# EAGLE board InkTime (EAGLE 9.7.0)
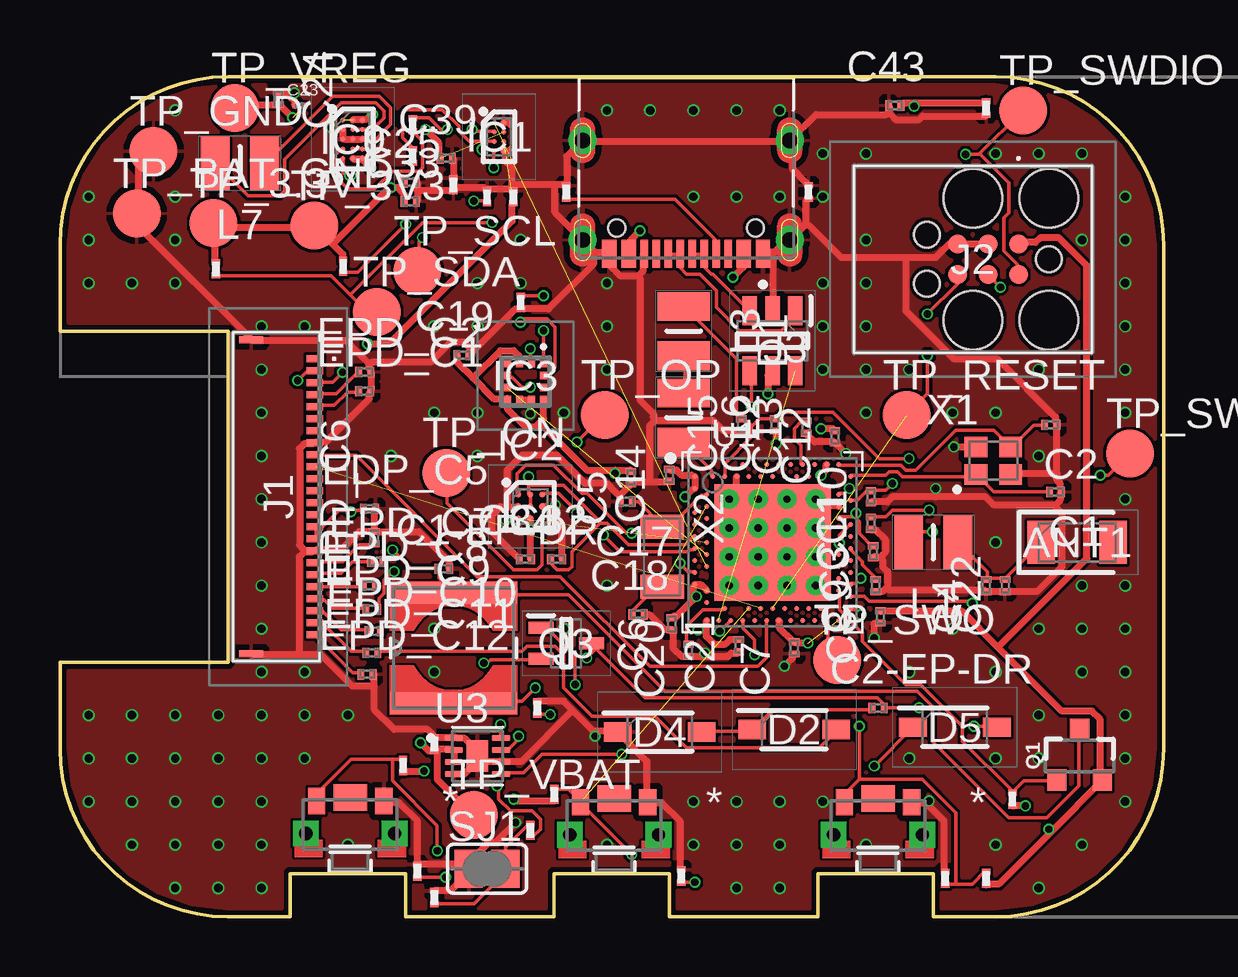
[diagram p0: board, top side]
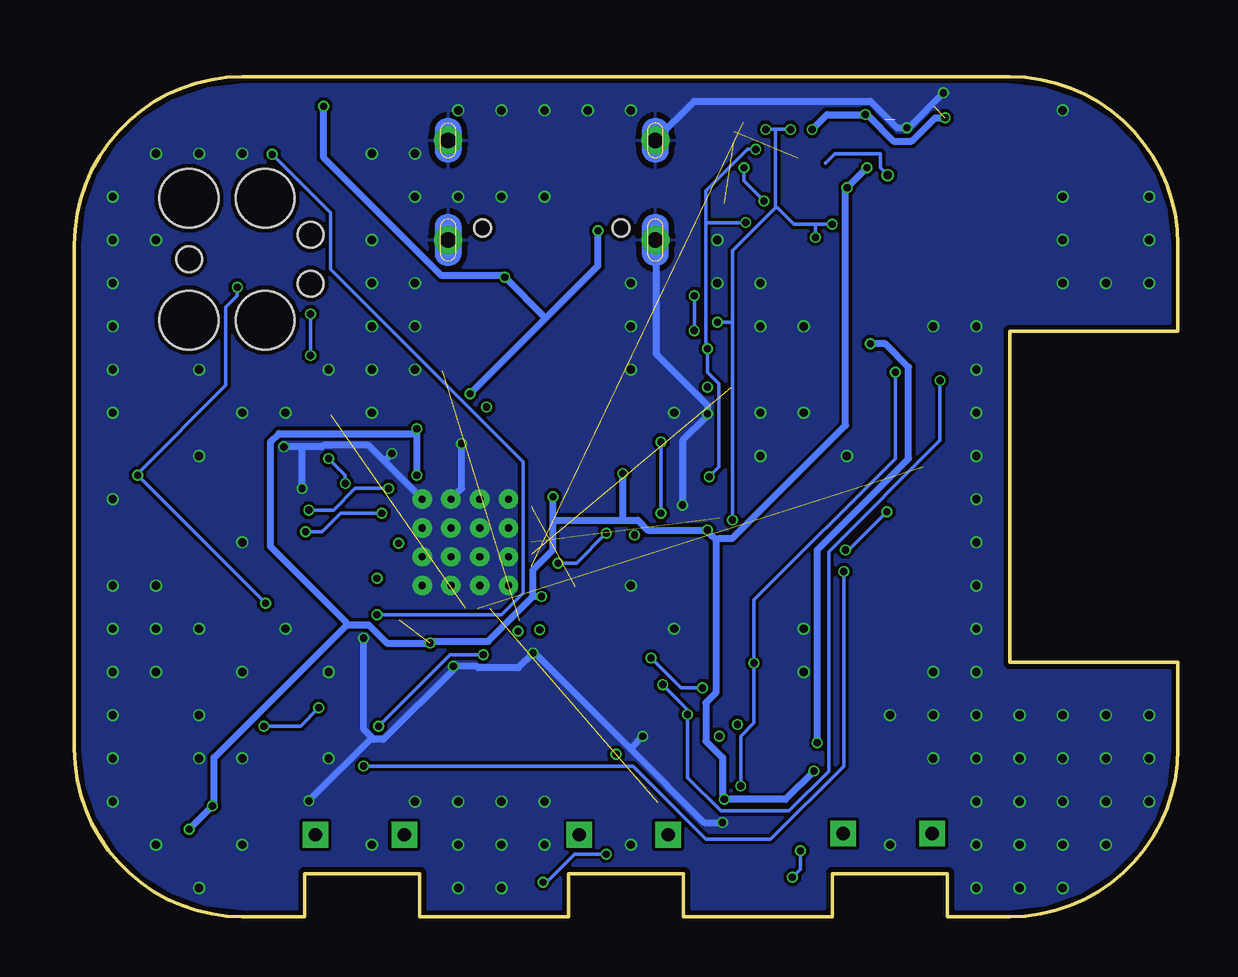
[diagram p1: board, bottom side, seen from below]

Size 46 x 35 mm. Coordinates in mm from the lower left corner, seen from the top.
Outline: 39,0 36.4,0 36.4,1.8 31.6,1.8 31.6,0 25.4,0 25.4,1.8 20.6,1.8 20.6,0 14.4,0 14.4,1.8 9.6,1.8 9.6,0 7,0 arc-90 0,7 0,10.6 7,10.6 7,24.4 0,24.4 0,28 arc-90 7,35 39,35 arc-90 46,28 46,7 arc-90 39,0
Copper layers (1+2*63+16): Top / GND / Bottom / layer 63
Stack-up 4 Layer Stack: Top SilkScreen Epoxy Ink / Top SolderMask User Defined 0.02mm Dk 4.3 / Top Surface Finish Lead-Free 0.02mm / Top User Defined 0.03mm / Dielectric-1 User Defined 0.034mm / Dielectric-2 User Defined 0.034mm / GND User Defined 0.03mm / Dielectric-3 User Defined 0.664mm / Power User Defined 0.03mm / Dielectric-4 User Defined 0.034mm / Dielectric-5 User Defined 0.034mm / Bottom User Defined 0.03mm / Bottom Surface Finish Lead-Free 0.02mm / Bottom SolderMask User Defined 0.02mm Dk 4.3 / Bottom SilkScreen Epoxy Ink
Design rules: minimum copper width all 0.15mm, minimum copper width classes=1 0.3mm, minimum copper width 0.15mm, minimum drill size 0.2mm, copper clearance wire_polygon to wire_polygon 5mil, copper clearance wire_polygon to pad_smd 5mil, copper clearance wire_polygon to via 5mil, copper clearance pad_smd to pad_smd 5mil, copper clearance pad_smd to via 5mil, copper clearance via to via 5mil, copper clearance smd to pad (same net) 5mil, copper clearance smd to via (same net) 5mil, copper clearance smd to smd (same net) 5mil, dimension clearance 0.2mm, via restrict clearance 0mil, restrict clearance 0mil, drill distance 6mil, keepout clearance 0mil
Net classes: 1 POWER: width 0.3 mm

## Footprints (pad centres in the part's own frame; a part is rotated, then mirrored left to right if it is on the bottom)
2450AT18B100E_ANTC3216X140N = smd 1.15 x 1.8: 1 -1.5,0; 2 1.5,0
NORDIC_NRF_3_RESC0201_L = smd 0.28 x 0.43: 1 -0.255,0; 2 0.255,0
GRM011R60J152KE01L_2_CAPC0201X13N = smd 0.22 x 0.23: 1 -0.185,0; 2 0.185,0
GRM011R60J152KE01L_1_0201 = smd 0.35 x 0.25: 1 0,0.275; 2 0,-0.275
ESP32_C6_LIBRARY_3_SOT95P280X145-6N = smd 1.2 x 0.6: 1 -1.25,0.95; 2 -1.25,0; 3 -1.25,-0.95; 4 1.25,-0.95; 5 1.25,0; 6 1.25,0.95
ESP32_C6_LIBRARY_5_SOD3716X135N = smd 1.15 x 0.8: 1 -1.75,0; 2 1.75,0
BQ25180YBGR_BGA8C40P2X4_100X155X50 = smd 0.2 x 0.2: A1 -0.2,0.6; A2 0.2,0.6; B1 -0.2,0.2; B2 0.2,0.2; C1 -0.2,-0.2; C2 0.2,-0.2; D1 -0.2,-0.6; D2 0.2,-0.6
DRV2605YZFR_BGA9C50P3X3_144X144X62 = smd 0.25 x 0.25: A1 -0.5,0.5; A2 0,0.5; A3 0.5,0.5; B1 -0.5,0; B2 0,0; B3 0.5,0; C1 -0.5,-0.5; C2 0,-0.5; C3 0.5,-0.5
BMA423_BMA423 = smd 0.3 x 0.35: 1 -0.75,-0.775; 2 -0.25,-0.775; 3 0.25,-0.775; 4 0.75,-0.775; 7 0.75,0.775; 8 0.25,0.775; 9 -0.25,0.775; 10 -0.75,0.775 | smd 0.35 x 0.3: 5 0.775,-0.25; 6 0.775,0.25; 11 -0.775,0.25; 12 -0.775,-0.25
RT6160AWSC_BGA15C40P3X5_140X230X60 = smd 0.216 x 0.216: A1 -0.4,0.8; A2 0,0.8; A3 0.4,0.8; B1 -0.4,0.4; B2 0,0.4; B3 0.4,0.4; C1 -0.4,0; C2 0,0; C3 0.4,0; D1 -0.4,-0.4; D2 0,-0.4; D3 0.4,-0.4; E1 -0.4,-0.8; E2 0,-0.8; E3 0.4,-0.8
503480-2400_5034802400 = smd 0.3 x 0.7: 1 -5.75,1.525; 2 -5.25,1.525; 3 -4.75,1.525; 4 -4.25,1.525; 5 -3.75,1.525; 6 -3.25,1.525; 7 -2.75,1.525; 8 -2.25,1.525; 9 -1.75,1.525; 10 -1.25,1.525; 11 -0.75,1.525; 12 -0.25,1.525; 13 0.25,1.525; 14 0.75,1.525; 15 1.25,1.525; 16 1.75,1.525; 17 2.25,1.525; 18 2.75,1.525; 19 3.25,1.525; 20 3.75,1.525; 21 4.25,1.525; 22 4.75,1.525; 23 5.25,1.525; 24 5.75,1.525 | smd 0.3 x 1: MP1 -6.54,-1.125; MP2 6.54,-1.125
TC2030-IDC_TC2030IDC = smd 0.783 x 0.783: 1 -0.953,-0.635; 2 -0.953,0.635; 3 0.317,-0.635; 4 0.317,0.635; 5 1.588,-0.635; 6 1.588,0.635 | hole 2.451: -2.223,-2.54; -2.223,2.54; 0.952,-2.54; 0.952,2.54 | hole 1.067: -2.223,0; 2.857,-1.016; 2.857,1.016
KH-TYPE-C-16P_KINGHELM_KH-TYPE-C-16P = smd 0.6 x 1.15: A1_B12 -3.2,4.725; A4_B9 -2.4,4.725; A9_B4 2.4,4.725; A12_B1 3.2,4.725 | smd 0.3 x 1.15: A5 -1.25,4.725; A6 -0.25,4.725; A7 0.25,4.725; A8 1.25,4.725; B5 1.75,4.725; B6 0.75,4.725; B7 -0.75,4.725; B8 -1.75,4.725 | drill 0.65 pad 1.05: SH1 -4.32,0; SH2 4.32,0; SH3 -4.32,4.15; SH4 4.32,4.15 | hole 0.7: -2.89,3.65; 2.89,3.65
MLP2016SR47MT0S1_INDC2016X100N = smd 1.2 x 2.2: 1 -1.028,0; 2 1.028,0
ESP32_C6_LIBRARY_2_IND_4828-WE-TPC_WRE = smd 0.9 x 5.3: 1 -2.286,0; 2 2.286,0
ESP32_C6_LIBRARY_4_ESP32_C6_LIBRARY_4_ESP32_C6_LIBRARY_4_ESP32_C6_LIBRARY_4_ESP32_WROVER_SPARKFUN-DISCRETESEMI_SOT23-3 = smd 0.8 x 0.9: 1 -0.95,-1; 2 0.95,-1; 3 0,1.1
ESP32_C6_LIBRARY_6_SOT65P210X110-3N = smd 1.05 x 0.5: 1 -1.05,0.65; 2 -1.05,-0.65; 3 1.05,0
CPF0201D7K68C1_0201 = smd 0.35 x 0.25: 1 0,0.275; 2 0,-0.275
ERA-1AEB3401C_0201 = smd 0.35 x 0.25: 1 0,0.275; 2 0,-0.275
ESP32_C6_LIBRARY_7_JUMPER_SJ = smd 1.168 x 1.6: 1 -0.762,0; 2 0.762,0
2025-10-22_07-23-44_LIBRARY_SW_EVP-AKE31A_PAN = smd 0.711 x 1.092: 1 -1.4,-0.972; 2 1.4,-0.972 | drill 0.559 pad 0.914 square: 3 -1.848,0.381; 4 1.848,0.381 | smd 1.397 x 1.092: 5 0,-1.124
HECTOR_WATCH_1_TP20R = smd 2 x 2: TP 0,0
NORDIC_NRF_4_AQFN50P700X700X85_HS-74N = smd 4.85 x 4.85: P$74 0,0 | drill 0.3 pad 0.6: P$75 -1.8,1.8; P$76 -0.6,1.8; P$77 0.6,1.8; P$78 1.8,1.8; P$79 -1.8,0.6; P$80 -0.6,0.6; P$81 0.6,0.6; P$82 1.8,0.6; P$83 -1.8,-0.6; P$84 -0.6,-0.6; P$85 0.6,-0.6; P$86 1.8,-0.6; P$87 -1.8,-1.8; P$88 -0.6,-1.8; P$89 0.6,-1.8; P$90 1.8,-1.8 | smd 0.2 x 0.2: P$A8 -1.25,3.25; P$A10 -0.75,3.25; P$A12 -0.25,3.25; P$A14 0.25,3.25; P$A16 0.75,3.25; P$A18 1.25,3.25; P$A20 1.75,3.25; P$A22 2.25,3.25; P$A23 2.75,3.25; P$AA24 3.25,-2.25; P$AB2 -2.75,-2.5; P$AC5 -2,-2.75; P$AC9 -1,-2.75; P$AC11 -0.5,-2.75; P$AC13 0,-2.75; P$AC15 0.5,-2.75; P$AC17 1,-2.75; P$AC19 1.5,-2.75; P$AC21 2,-2.75; P$AC24 3.25,-2.75; P$AD2 -2.75,-3.25; P$AD4 -2.25,-3.25; P$AD6 -1.75,-3.25; P$AD8 -1.25,-3.25; P$AD10 -0.75,-3.25; P$AD12 -0.25,-3.25; P$AD14 0.25,-3.25; P$AD16 0.75,-3.25; P$AD18 1.25,-3.25; P$AD20 1.75,-3.25; P$AD22 2.25,-3.25; P$AD23 2.75,-3.25; P$B1 -3.25,2.75; P$B3 -2.5,2.75; P$B5 -2,2.75; P$B7 -1.5,2.75; P$B9 -1,2.75; P$B11 -0.5,2.75; P$B13 0,2.75; P$B15 0.5,2.75; P$B17 1,2.75; P$B19 1.5,2.75; P$B24 3.25,2.75; P$C1 -3.25,2.25; P$D2 -2.75,2; P$D23 2.75,2; P$E24 3.25,1.75; P$F2 -2.75,1.5; P$F23 2.75,1.5; P$G1 -3.25,1.25; P$H2 -2.75,1; P$H23 2.75,1; P$J1 -3.25,0.75; P$J24 3.25,0.75; P$K2 -2.75,0.5; P$L1 -3.25,0.25; P$L24 3.25,0.25; P$M2 -2.75,0; P$N1 -3.25,-0.25; P$N24 3.25,-0.25; P$P2 -2.75,-0.5; P$P23 2.75,-0.5; P$R1 -3.25,-0.75; P$R24 3.25,-0.75; P$T2 -2.75,-1; P$T23 2.75,-1; P$U1 -3.25,-1.25; P$U24 3.25,-1.25; P$V23 2.75,-1.5; P$W1 -3.25,-1.75; P$W24 3.25,-1.75; P$Y2 -2.75,-2; P$Y23 2.75,-2
ESP32_C6_LIBRARY_SON50P200X200X80-9N = smd 0.76 x 0.27: 1 -0.985,0.75; 2 -0.985,0.25; 3 -0.985,-0.25; 4 -0.985,-0.75; 5 0.985,-0.75; 6 0.985,-0.25; 7 0.985,0.25; 8 0.985,0.75 | smd 0.9 x 1.3: 9 0,0
NORDIC_NRF_BT-XTAL_2016_N = smd 0.95 x 0.85: 1 -0.725,-0.575; 2 0.725,-0.575; 3 0.725,0.575; 4 -0.725,0.575
NORDIC_NRF_1_XTAL_3215_N = smd 1 x 1.8: 1 -1.25,0; 2 1.25,0

## Placement (x,y rotation side)
ANT1  2450AT18B100E_2450AT18B100E  [2450AT18B100E_ANTC3216X140N]  42.4,15.6 0 top
C1  12pF  [NORDIC_NRF_3_RESC0201_L]  41.5,17.7 180 top
C1-EP-DR  10uF  [NORDIC_NRF_3_RESC0201_L]  16,14.5 0 top
C2  12pF  [NORDIC_NRF_3_RESC0201_L]  41.3,20.5 180 top
C2-EP-DR  4.7uF/25V  [NORDIC_NRF_3_RESC0201_L]  34.1,8.7 0 top
C3  1pF  [NORDIC_NRF_3_RESC0201_L]  33.9,15.2 90 top
C4  1pF  [NORDIC_NRF_3_RESC0201_L]  38.6,13.8 90 top
C5  100nF  [NORDIC_NRF_3_RESC0201_L]  23.8,18.3 90 top
C6  4.7uF  [NORDIC_NRF_3_RESC0201_L]  25.5,12.2 90 top
C7  100nF  [NORDIC_NRF_3_RESC0201_L]  30.6,11.2 90 top
C8  100nF  [NORDIC_NRF_3_RESC0201_L]  34.2,12.5 90 top
C9  820pF  [NORDIC_NRF_3_RESC0201_L]  34,13.8 90 top
C10  100pF  [NORDIC_NRF_3_RESC0201_L]  33.8,17.5 90 top
C11  100pF  [NORDIC_NRF_3_RESC0201_L]  33.8,16.4 90 top
C12  100nF  [NORDIC_NRF_3_RESC0201_L]  32.3,20 90 top
C13  100nF  [NORDIC_NRF_3_RESC0201_L]  31.1,20.4 90 top
C14  4.7uF  [NORDIC_NRF_3_RESC0201_L]  25.4,18.4 90 top
C15  1.0uF  [NORDIC_NRF_3_RESC0201_L]  28.4,20.5 90 top
C16  47nF  [NORDIC_NRF_3_RESC0201_L]  29.8,20.5 90 top
C17  12pF  [NORDIC_NRF_3_RESC0201_L]  23.6,17.3 180 top
C18  12pF  [NORDIC_NRF_3_RESC0201_L]  24.1,12.6 0 top
C19  100nF  [NORDIC_NRF_3_RESC0201_L]  16.8,23.4 0 top
C20  4.7uF  [NORDIC_NRF_3_RESC0201_L]  26.2,11.1 90 top
C21  4.7uF  [NORDIC_NRF_3_RESC0201_L]  28.3,11.3 90 top
C22  1pF  [NORDIC_NRF_3_RESC0201_L]  39.4,13.8 90 top
C23  0.1uF  [GRM011R60J152KE01L_2_CAPC0201X13N]  10,33.8 0 top
C24  10uF  [NORDIC_NRF_3_RESC0201_L]  9.1,34.1 270 top
C25  22uF  [NORDIC_NRF_3_RESC0201_L]  14.6,30.6 0 top
C27  0.1uF  [GRM011R60J152KE01L_1_0201]  15.6,7.2 0 top
C29  1uF  [GRM011R60J152KE01L_1_0201]  14.9,1.9 0 top
C30  1uF  [GRM011R60J152KE01L_1_0201]  36.9,1.6 0 top
C31  1uF  [GRM011R60J152KE01L_1_0201]  25.9,1.7 0 top
C32  1uF  [NORDIC_NRF_3_RESC0201_L]  20.7,14.9 0 top
C33  22uF  [NORDIC_NRF_3_RESC0201_L]  14.6,29.8 0 top
C34  0.1uF  [NORDIC_NRF_3_RESC0201_L]  19.4,14.9 0 top
C37  1uF  [GRM011R60J152KE01L_1_0201]  18.9,30 0 top
C38  1uF  [GRM011R60J152KE01L_1_0201]  16.4,30.5 0 top
C39  10uF  [NORDIC_NRF_3_RESC0201_L]  16.1,31.6 0 top
C42  0.1uF  [GRM011R60J152KE01L_1_0201]  38.6,33.7 0 top
C43  4.7uF  [NORDIC_NRF_3_RESC0201_L]  34.8,33.8 0 top
D1  ESP32_C6_LIBRARY_3_USBLC6-2SC6Y  [ESP32_C6_LIBRARY_3_SOT95P280X145-6N]  29.7,24 270 top
D2  ESP32_C6_LIBRARY_5_MBR0530  [ESP32_C6_LIBRARY_5_SOD3716X135N]  30.6,7.8 0 top
D4  ESP32_C6_LIBRARY_5_MBR0530  [ESP32_C6_LIBRARY_5_SOD3716X135N]  25,7.7 0 top
D5  ESP32_C6_LIBRARY_5_MBR0530  [ESP32_C6_LIBRARY_5_SOD3716X135N]  37.3,7.9 0 top
EDP_C5  1uF/50V  [NORDIC_NRF_3_RESC0201_L]  12.9,17 0 top
EPD_C1  1uF/50V  [NORDIC_NRF_3_RESC0201_L]  12.7,21.9 0 top
EPD_C2  1uF/50V  [NORDIC_NRF_3_RESC0201_L]  12.7,22.7 0 top
EPD_C6  1uF/50V  [NORDIC_NRF_3_RESC0201_L]  13.1,15.8 90 top
EPD_C7  1uF/50V  [NORDIC_NRF_3_RESC0201_L]  13.2,14.8 0 top
EPD_C8  1uF/50V  [NORDIC_NRF_3_RESC0201_L]  12.9,13.8 0 top
EPD_C9  1uF/50V  [NORDIC_NRF_3_RESC0201_L]  13,12.8 0 top
EPD_C10  1uF/50V  [NORDIC_NRF_3_RESC0201_L]  13.1,11.9 0 top
EPD_C11  1uF/50V  [NORDIC_NRF_3_RESC0201_L]  13,11 0 top
EPD_C12  1uF/50V  [NORDIC_NRF_3_RESC0201_L]  12.8,10.1 0 top
IC1  BQ25180YBGR_BQ25180YBGR  [BQ25180YBGR_BGA8C40P2X4_100X155X50]  18.3,32.5 0 top
IC2  DRV2605YZFR_DRV2605YZFR  [DRV2605YZFR_BGA9C50P3X3_144X144X62]  19.6,17.1 0 top
IC3  BMA423_BMA423  [BMA423_BMA423]  19.4,22.3 180 top
IC9  RT6160AWSC_RT6160AWSC  [RT6160AWSC_BGA15C40P3X5_140X230X60]  12.2,32.4 0 top
J1  503480-2400_503480-2400  [503480-2400_5034802400]  9.1,17.5 270 top
J2  TC2030-IDC_TC2030-IDC  [TC2030-IDC_TC2030IDC]  39,27.4 180 top
J3  KH-TYPE-C-16P_KH-TYPE-C-16P  [KH-TYPE-C-16P_KINGHELM_KH-TYPE-C-16P]  26.1,32.35 180 top
L1  3.9nH  [MLP2016SR47MT0S1_INDC2016X100N]  36.4,15.6 0 top
L2  10uH  [MLP2016SR47MT0S1_INDC2016X100N]  26,20.8 90 top
L3  15nH  [MLP2016SR47MT0S1_INDC2016X100N]  26,24.4 90 top
L5  68uH  [ESP32_C6_LIBRARY_2_IND_4828-WE-TPC_WRE]  16.4,11.2 90 top
L7  MLP2016SR47MT0S1_FTC252012SR47MBCA  [MLP2016SR47MT0S1_INDC2016X100N]  7.5,31.4 0 top
Q1  20V/4.2A/52mΩ/1.4W  [ESP32_C6_LIBRARY_4_ESP32_C6_LIBRARY_4_ESP32_C6_LIBRARY_4_ESP32_C6_LIBRARY_4_ESP32_WROVER_SPARKFUN-DISCRETESEMI_SOT23-3]  42.5,6.7 0 top
Q3  ESP32_C6_LIBRARY_6_SI1308EDL-T1-GE3  [ESP32_C6_LIBRARY_6_SOT65P210X110-3N]  21.1,11.4 0 top
R1  0  [CPF0201D7K68C1_0201]  14.7,33 0 top
R1_EP_DR  0.47  [CPF0201D7K68C1_0201]  19.6,3.6 0 top
R1_USB  5K1  [ERA-1AEB3401C_0201]  21.1,30.2 0 top
R2  0  [CPF0201D7K68C1_0201]  14.7,31.7 0 top
R2_EP_DR  10K  [CPF0201D7K68C1_0201]  19.9,8.7 0 top
R2_USB  5K1  [ERA-1AEB3401C_0201]  31.2,30.2 0 top
R3  0  [ERA-1AEB3401C_0201]  19.2,25.6 180 top
R5  10K  [ERA-1AEB3401C_0201]  38.6,1.6 0 top
R7  10K  [ERA-1AEB3401C_0201]  14.3,6.3 0 top
R8  10K  [ERA-1AEB3401C_0201]  20.6,5.1 0 top
R9  10K  [ERA-1AEB3401C_0201]  17.8,30 0 top
R17  3K3  [ERA-1AEB3401C_0201]  11.8,27.1 0 top
R18  3K3  [ERA-1AEB3401C_0201]  6.5,27 0 top
R_PWR_EPD  10K  [CPF0201D7K68C1_0201]  39.7,4.9 0 top
R_TYPE_SEL  2.2  [CPF0201D7K68C1_0201]  15.6,0.8 0 top
SJ1  Open  [ESP32_C6_LIBRARY_7_JUMPER_SJ]  17.8,2 0 top
SW_DN  2025-10-22_07-23-44_LIBRARY_EVP-AKE31ASW_EVP-AKE31A_PAN  [2025-10-22_07-23-44_LIBRARY_SW_EVP-AKE31A_PAN]  12.1,3.85 180 top
SW_ENT  2025-10-22_07-23-44_LIBRARY_EVP-AKE31ASW_EVP-AKE31A_PAN  [2025-10-22_07-23-44_LIBRARY_SW_EVP-AKE31A_PAN]  23.1,3.8 180 top
SW_UP  2025-10-22_07-23-44_LIBRARY_EVP-AKE31ASW_EVP-AKE31A_PAN  [2025-10-22_07-23-44_LIBRARY_SW_EVP-AKE31A_PAN]  34.1,3.8 180 top
TP_3.3V  HECTOR_WATCH_1_TPTP20R  [HECTOR_WATCH_1_TP20R]  6.4,28.9 0 top
TP_3V3  HECTOR_WATCH_1_TPTP20R  [HECTOR_WATCH_1_TP20R]  10.6,28.8 0 top
TP_BAT_GND  HECTOR_WATCH_1_TPTP20R  [HECTOR_WATCH_1_TP20R]  3.2,29.3 0 top
TP_GND  HECTOR_WATCH_1_TPTP20R  [HECTOR_WATCH_1_TP20R]  3.9,31.9 0 top
TP_ON  HECTOR_WATCH_1_TPTP20R  [HECTOR_WATCH_1_TP20R]  16.1,18.5 0 top
TP_OP  HECTOR_WATCH_1_TPTP20R  [HECTOR_WATCH_1_TP20R]  22.7,20.9 0 top
TP_RESET  HECTOR_WATCH_1_TPTP20R  [HECTOR_WATCH_1_TP20R]  35.3,20.9 0 top
TP_SCL  HECTOR_WATCH_1_TPTP20R  [HECTOR_WATCH_1_TP20R]  14.9,26.9 0 top
TP_SDA  HECTOR_WATCH_1_TPTP20R  [HECTOR_WATCH_1_TP20R]  13.2,25.2 0 top
TP_SWDCLK  HECTOR_WATCH_1_TPTP20R  [HECTOR_WATCH_1_TP20R]  44.6,19.3 0 top
TP_SWDIO  HECTOR_WATCH_1_TPTP20R  [HECTOR_WATCH_1_TP20R]  40.15,33.6 0 top
TP_SWO  HECTOR_WATCH_1_TPTP20R  [HECTOR_WATCH_1_TP20R]  32.4,10.7 0 top
TP_VBAT  HECTOR_WATCH_1_TPTP20R  [HECTOR_WATCH_1_TP20R]  17.25,4.25 0 top
TP_VREG  HECTOR_WATCH_1_TPTP20R  [HECTOR_WATCH_1_TP20R]  7.3,33.7 0 top
U1  NORDIC_NRF_4_NRF52840_QF  [NORDIC_NRF_4_AQFN50P700X700X85_HS-74N]  29.7,15.6 0 top
U3  ESP32_C6_LIBRARY_MAX17048G+T10  [ESP32_C6_LIBRARY_SON50P200X200X80-9N]  17.4,6.7 0 top
X1  32MHz  [NORDIC_NRF_BT-XTAL_2016_N]  38.9,19 0 top
X2  32.768kHz  [NORDIC_NRF_1_XTAL_3215_N]  25.1,15 270 top

## Library data of the parts
ANT1 = InkTime_v5; ARROW_PART_NUMBER: 2450AT18B100E; ARROW_PRICE-STOCK: https://www.arrow.com/en/products/2450at18b100e/johanson-dielectrics?utm_currency=USD&region=nac; DESCRIPTION: Antennas 2.45GHz ANTENNA; HEIGHT: 1.4mm; MANUFACTURER_NAME: JOHANSON TECHNOLOGY; MANUFACTURER_PART_NUMBER: 2450AT18B100E; MOUSER_PART_NUMBER: 609-2450AT18B100E; MOUSER_PRICE-STOCK: https://www.mouser.co.uk/ProductDetail/Johanson-Technology/2450AT18B100E?qs=yCnrNFeXz%252Bh5MFsFIXGZGA%3D%3D
C1 C1-EP-DR C2 C2-EP-DR C3-C22 C24 C25 C27 C29-C34 C37-C39 C42 C43 EDP_C5 EPD_C1 EPD_C2 EPD_C6-EPD_C12 R1 R1_EP_DR R1_USB R2 R2_EP_DR R2_USB R3 R5 R7-R9 R17 R18 R_PWR_EPD R_TYPE_SEL SJ1 TP_3.3V TP_3V3 TP_BAT_GND TP_GND TP_ON TP_OP TP_RESET TP_SCL TP_SDA TP_SWDCLK TP_SWDIO TP_SWO TP_VBAT TP_VREG U1 X1 X2 = InkTime_v5
C23 = InkTime_v5; AVAILABILITY: In Stock; CHECK_PRICES: https://www.snapeda.com/parts/GRM011R60J152KE01L/Murata/view-part/?ref=eda; DESCRIPTION: SMD Capacitor X5R(EIA) with Capacitance: 1500pF Tol. 10%. Rated Voltage: 6.3Vdc; MF: Murata; MP: GRM011R60J152KE01L; PACKAGE: 0201 Murata; PRICE: None; SNAPEDA_LINK: https://www.snapeda.com/parts/GRM011R60J152KE01L/Murata/view-part/?ref=snap
D1 = InkTime_v5; AVAILABILITY: In Stock; CHECK_PRICES: https://www.snapeda.com/parts/USBLC6-2SC6Y/STMicroelectronics/view-part/?ref=eda; DESCRIPTION: 17V Clamp 5A (8/20µs) Ipp Tvs Diode Surface Mount SOT-23-6; MF: STMicroelectronics; MP: USBLC6-2SC6Y; PACKAGE: SOT-23-6 STMicroelectronics; PRICE: None; SNAPEDA_LINK: https://www.snapeda.com/parts/USBLC6-2SC6Y/STMicroelectronics/view-part/?ref=snap
D2 D4 D5 = InkTime_v5; AVAILABILITY: In Stock; CHECK_PRICES: https://www.snapeda.com/parts/MBR0530/Onsemi/view-part/?ref=eda; DESCRIPTION: Diode Schottky 30 V 500mA Surface Mount SOD-123; MF: ON Semiconductor; MP: MBR0530; PACKAGE: SOD-123-2 ON Semiconductor; PRICE: None; PURCHASE-URL: https://www.snapeda.com/api/url_track_click_mouser/?unipart_id=179458&manufacturer=ON Semiconductor&part_name=MBR0530&search_term=None; SNAPEDA_LINK: https://www.snapeda.com/parts/MBR0530/Onsemi/view-part/?ref=snap
IC1 = InkTime_v5; ARROW_PART_NUMBER: BQ25180YBGR; ARROW_PRICE-STOCK: https://www.arrow.com/en/products/bq25180ybgr/texas-instruments?utm_currency=USD&region=nac; DESCRIPTION: Charger IC Lithium Ion/Polymer, Lithium Iron Phosphate 8-DSBGA (1.6x1.1); HEIGHT: 0.5mm; MANUFACTURER_NAME: Texas Instruments; MANUFACTURER_PART_NUMBER: BQ25180YBGR; MOUSER_PART_NUMBER: 595-BQ25180YBGR; MOUSER_PRICE-STOCK: https://www.mouser.co.uk/ProductDetail/Texas-Instruments/BQ25180YBGR?qs=doiCPypUmgEWjAK%252BJAX6Tw%3D%3D
IC2 = InkTime_v5; ARROW_PART_NUMBER: DRV2605YZFR; ARROW_PRICE-STOCK: https://www.arrow.com/en/products/drv2605yzfr/texas-instruments?region=nac; DESCRIPTION: Haptic Driver for ERM/LRA with Built-In Library and Smart Loop Architecture; HEIGHT: 0.625mm; MANUFACTURER_NAME: Texas Instruments; MANUFACTURER_PART_NUMBER: DRV2605YZFR
IC3 = InkTime_v5; ARROW_PART_NUMBER: BMA423; ARROW_PRICE-STOCK: https://www.arrow.com/en/products/bma423/bosch; DESCRIPTION: Accelerometers Triaxial low-g 12bit Acceleration Sensor; HEIGHT: 1mm; MANUFACTURER_NAME: BOSCH; MANUFACTURER_PART_NUMBER: BMA423; MOUSER_PART_NUMBER: 262-BMA423; MOUSER_PRICE-STOCK: https://www.mouser.co.uk/ProductDetail/Bosch-Sensortec/BMA423?qs=HXFqYaX1Q2xC%252BSgeGoX3mg%3D%3D
IC9 = InkTime_v5; DESCRIPTION: Buck-Boost Regulator Positive Output Step-Up/Step-Down I2C DC-DC Controller IC 15-WL-CSP (BSC) (1.4x2.3); HEIGHT: 0.6mm; MANUFACTURER_NAME: RICHTEK; MANUFACTURER_PART_NUMBER: RT6160AWSC; MOUSER_PART_NUMBER: 835-RT6160AWSC; MOUSER_PRICE-STOCK: https://www.mouser.co.uk/ProductDetail/Richtek/RT6160AWSC?qs=amGC7iS6iy%2FLd9PSoixZXQ%3D%3D
J1 = InkTime_v5; DESCRIPTION: FFC & FPC Connectors 0.5mm FPC RA SMT Dual Contact 24Ckt; HEIGHT: 1.87mm; MANUFACTURER_NAME: Molex; MANUFACTURER_PART_NUMBER: 503480-2400; MOUSER_PART_NUMBER: 538-503480-2400; MOUSER_PRICE-STOCK: https://www.mouser.co.uk/ProductDetail/Molex/503480-2400?qs=OAhjpuo3Vu7efIoxFh9AOw%3D%3D
J2 = InkTime_v5; DESCRIPTION: CABLE ADAPTER 6 POS; HEIGHT: 19mm; MANUFACTURER_NAME: Tag Connect; MANUFACTURER_PART_NUMBER: TC2030-IDC
J3 = InkTime_v5; AVAILABILITY: Not in stock; CHECK_PRICES: https://www.snapeda.com/parts/KH-TYPE-C-16P/Kinghelm/view-part/?ref=eda; MF: kinghelm; MP: KH-TYPE-C-16P; PACKAGE: None; PRICE: None; SNAPEDA_LINK: https://www.snapeda.com/parts/KH-TYPE-C-16P/Kinghelm/view-part/?ref=snap
L1-L3 L7 = InkTime_v5; DESCRIPTION: SMD / SMT Inductors (Coils), L=0.47?H, L x W x T :; HEIGHT: 1mm; JLCPCB: https://jlcpcb.com/partdetail/6763488-FTC252012SR47MBCA/C5832368; MANUFACTURER_NAME: TDK; MANUFACTURER_PART_NUMBER: FTC252012SR47MBCA
L5 = InkTime_v5; COPYRIGHT: Copyright (C) 2024 Ultra Librarian. All rights reserved.; MANUFACTURER_PART_NUMBER: 744043680; MFR_NAME: Wurth Electronics
Q1 = InkTime_v5; PROD_ID: TRAN-14388
Q3 = InkTime_v5; AVAILABILITY: In Stock; CHECK_PRICES: https://www.snapeda.com/parts/SI1308EDL-T1-GE3/Vishay+Siliconix/view-part/?ref=eda; DESCRIPTION: Si1308EDL-T1-GE3 N-channel MOSFET Transistor, 1.5 A, 30 V, 3-Pin SC-70 | Siliconix / Vishay SI1308EDL-T1-GE3; MF: Vishay Siliconix; MP: SI1308EDL-T1-GE3; PACKAGE: SOT-323 Vishay Semiconductor; PRICE: None; PURCHASE-URL: https://www.snapeda.com/api/url_track_click_mouser/?unipart_id=274603&manufacturer=Vishay Siliconix&part_name=SI1308EDL-T1-GE3&search_term=None; SNAPEDA_LINK: https://www.snapeda.com/parts/SI1308EDL-T1-GE3/Vishay+Siliconix/view-part/?ref=snap
SW_DN SW_ENT SW_UP = InkTime_v5; COPYRIGHT: Copyright (C) 2025 Ultra Librarian. All rights reserved.; DIGI-KEY_PART_NUMBER_1: P123437TR-ND; DIGI-KEY_PART_NUMBER_2: P123437CT-ND; DIGI-KEY_PART_NUMBER_3: P123437DKR-ND; MANUFACTURER_NAME: Panasonic; MANUFACTURER_PART_NUMBER: EVP-AKE31A
U3 = InkTime_v5; AVAILABILITY: In Stock; CHECK_PRICES: https://www.snapeda.com/parts/MAX17048G+T10/Analog+Devices/view-part/?ref=eda; DESCRIPTION: 3µA 1-Cell/2-Cell Fuel Gauge with ModelGauge; MF: Analog Devices; MP: MAX17048G+T10; PACKAGE: TDFN-8 Maxim; PRICE: None; PURCHASE-URL: https://www.snapeda.com/api/url_track_click_mouser/?unipart_id=329239&manufacturer=Analog Devices&part_name=MAX17048G+T10&search_term=None; SNAPEDA_LINK: https://www.snapeda.com/parts/MAX17048G+T10/Analog+Devices/view-part/?ref=snap

## Nets
3V3 [POWER]: C5.2 C6.2 C7.2 C8.2 C12.2 C14.2 C19.1 C25.1 C33.1 C34.2 IC2.C2 IC3.3 IC3.7 IC3.10 IC9.E2 IC9.E3 J2.1 Q1.2 R5.2 R7.2 R8.2 R17.1 R18.1 R_PWR_EPD.2 TP_3.3V.TP TP_3V3.TP U1.P$A22 U1.P$AD14 U1.P$AD23 U1.P$B1 U1.P$C1 U1.P$W1 U1.P$Y2
ALERT: U1.P$J24 U3.5
D+: D1.4 U1.P$AD6
D-: D1.6 U1.P$AD4
DEC3: C11.2 U1.P$D23
DEC4_6: C10.2 C15.2 C16.2 L3.2 U1.P$B5 U1.P$E24
DN: D1.1 J3.A7 J3.B6
DP: D1.3 J3.A6 J3.B7
EDP_CS: J1.12
EDP_DC: J1.11
EPD_3V3: C1-EP-DR.1 EDP_C5.1 J1.15 J1.16 L5.2 Q1.3
EPD_BUSY: J1.9 U1.P$AD12
EPD_CS: U1.P$K2
EPD_DC: U1.P$AD10
EPD_RST: J1.10 U1.P$AC11
GDR: J1.2 Q3.1 R2_EP_DR.2
GND [POWER]: C1-EP-DR.2 C1.1 C2.1 C3.1 C4.1 C5.1 C6.1 C7.1 C8.1 C9.1 C10.1 C11.1 C12.1 C13.1 C14.1 C15.1 C16.1 C17.2 C18.2 C19.2 C20.1 C21.1 C22.1 C23.1 C24.1 C25.2 C27.1 C29.1 C30.1 C31.1 C32.2 C33.2 C34.1 C37.1 C38.1 C38.2 C39.2 C42.2 C43.1 D1.2 D4.1 EDP_C5.2 EPD_C1.2 EPD_C2.2 EPD_C6.2 EPD_C12.2 IC1.A2 IC1.D2 IC2.B1 IC2.B3 IC3.8 IC3.9 IC9.B1 IC9.C1 IC9.C2 IC9.C3 J1.8 J1.17 J1.MP1 J1.MP2 J2.3 J2.5 J3.A1_B12 J3.A12_B1 J3.B5 J3.SH1 J3.SH2 J3.SH3 J3.SH4 R1_USB.1 R2_EP_DR.1 R2_USB.1 R2_USB.2 R3.1 R9.1 R_TYPE_SEL.1 SJ1.1 SW_DN.1 SW_ENT.1 SW_UP.1 TP_BAT_GND.TP TP_GND.TP U1.P$74 U1.P$75 U1.P$76 U1.P$77 U1.P$78 U1.P$79 U1.P$80 U1.P$81 U1.P$82 U1.P$83 U1.P$84 U1.P$85 U1.P$86 U1.P$87 U1.P$88 U1.P$89 U1.P$90 U1.P$B7 U1.P$F23 U3.1 U3.4 U3.6 U3.9 X1.2 X1.4
HAPTIC_EN: IC2.A1 U1.P$U1
IMU_INT1: IC3.5 U1.P$N1
IMU_INT2: IC3.6 U1.P$P2
LX1: IC9.B2 IC9.B3 L7.1
LX2: IC9.D2 IC9.D3 L7.2
MOSI: J1.14
MOSI/2.2D: U1.P$B13
N$1: IC9.D1 R1.2
N$2: IC1.D1 R9.2
N$3: IC3.1 R3.2
N$4: IC9.E1 R2.2
N$5: C20.2 U1.P$AC5
N$6: C9.2 U1.P$N24
N$7: C3.2 L1.1 U1.P$H23
N$8: ANT1.1 C4.2 C22.2 L1.2
N$9: L2.1 U1.P$B3
N$10: L2.2 L3.1
N$11: C13.2 U1.P$A18
N$12: C1.2 U1.P$B24 X1.1
N$13: C2.2 U1.P$A23 X1.3
N$15: C2-EP-DR.2 D5.2 L5.1 Q3.3
N$16: C2-EP-DR.1 D2.1 D4.2
N$17: R1_EP_DR.1 R_TYPE_SEL.2 SJ1.2
N$19: EPD_C2.1 J1.4
N$20: EPD_C1.1 J1.5
N$21: EPD_C6.1 J1.18
N$22: EPD_C7.1 J1.19
N$23: EPD_C8.1 J1.20
N$24: EPD_C9.1 J1.21
N$25: EPD_C10.1 J1.22
N$26: EPD_C11.1 J1.23
N$27: EPD_C12.1 J1.24
N$28: J3.A5 R1_USB.2
N$29: EPD_C7.2
N$30: EPD_C8.2
N$32: EPD_C10.2
OUT+: IC2.A3 TP_OP.TP
OUT-: IC2.C3 TP_ON.TP
P0.00: C17.1 U1.P$D2 X2.1
P0.01: C18.1 U1.P$F2 X2.2
P0.04: U1.P$J1
P0.09: U1.P$L24
P0.13: C30.2 R5.1 SW_UP.2 U1.P$AD8
P0.14: C31.2 R8.1 SW_ENT.2 U1.P$AC9
P0.19: U1.P$AC15
P0.20: U1.P$AD16
P0.21: U1.P$AC17
P0.22: U1.P$AD18
P0.23: U1.P$AC19
P0.24: U1.P$AD20
P0.25: U1.P$AC21
P0.26: U1.P$G1
P0.27: U1.P$H2
P0.28: U1.P$B11
P0.29: U1.P$A10
P0.30: U1.P$B9
P0.31: U1.P$A8
P1.01: Q1.1 R_PWR_EPD.1 U1.P$Y23
P1.02: C29.2 R7.1 SW_DN.2 U1.P$W24
P1.03: U1.P$V23
P1.04: U1.P$U24
P1.05: U1.P$T23
P1.06: U1.P$R24
P1.07: U1.P$P23
P1.09: U1.P$R1
P1.10: U1.P$A20
P1.11: U1.P$B19
P1.12: U1.P$B17
P1.13: U1.P$A16
P1.14: U1.P$B15
P1.15: U1.P$A14
PMIC_INT: IC1.A1 U1.P$T2
PREVGH: D5.1 EPD_C9.2
PREVGL: D2.2 EPD_C11.2
RESE: J1.3 Q3.2 R1_EP_DR.2
RESET: J2.6 TP_RESET.TP U1.P$AC13
SCK: J1.13
SCK/2.2D: U1.P$A12
SCL: IC1.B1 IC2.C1 IC3.12 R1.1 R17.2 TP_SCL.TP U1.P$M2 U3.7
SDA: C32.1 IC1.C1 IC2.A2 IC2.B2 IC3.2 R2.1 R18.2 TP_SDA.TP U1.P$L1 U3.8
SWDCLK: J2.4 TP_SWDCLK.TP U1.P$AA24
SWDIO: J2.2 TP_SWDIO.TP U1.P$AC24
SWO: TP_SWO.TP U1.P$AD22
VBAT [POWER]: C27.2 C37.2 IC1.C2 TP_VBAT.TP U3.2 U3.3
VBUS [POWER]: C21.2 C42.1 C43.2 D1.5 J3.A4_B9 J3.A9_B4 U1.P$AD2
VREG [POWER]: C23.2 C24.2 C39.1 IC1.B2 IC9.A1 IC9.A2 IC9.A3 TP_VREG.TP

## Tracks (layer width: path | path; a pad name or v marks a point on that pad's centre or on a via)
3V3  (via drill 0.3)  (1 unrouted)
  Top 0.3: R18.1 6.45,27.33 6.45,28.86 TP_3.3V.TP 6.59,28.72 10.47,28.72 TP_3V3.TP 10.6,28.79 11.37,28.03 | 12.54,31.56 12.27,31.56 IC9.E2 | 12.54,31.56 IC9.E3 | v12.96,31.21 12.68,31.49 12.54,31.56 | 14.14,30.38 v13.79,30.38 13.65,30.31 11.37,28.03 | 14.14,30.38 14.34,30.59 C25.1 | C33.1 14.34,29.83 14.34,30.1 14.21,30.24 14.14,30.38 | 11.37,28.03 11.78,27.61 11.78,27.4 R17.1 | 17.22,22.45 16.56,23.11 16.56,23.39 C19.1 | 17.22,22.45 18.08,21.59 18.64,21.59 IC3.7 18.64,21.38 18.64,21.17 19.4,20.41 19.81,20.41 19.99,20.58 | 19.99,20.58 20.16,20.75 20.16,21.52 IC3.10 | 17.22,22.45 18.36,23.59 18.91,23.59 19.12,23.39 19.12,23.11 IC3.3 | 23.14,18.61 21.96,18.61 19.99,20.58 | 23.14,18.61 23.76,18.61 C5.2 | v18.91,4.9 18.98,4.83 20.58,4.83 R8.2 | v15.18,6.07 14.34,6.07 R7.2 | v31.73,18.4 31.93,18.61 31.93,18.82 U1.P$A22 | v31.73,20.34 32.21,20.34 32.28,20.27 C12.2 | 26.46,13.83 26.74,13.83 26.95,13.62 U1.P$Y2 | 26.46,13.83 U1.P$W1 | 26.39,13.34 26.39,13.69 26.46,13.83 | 26.39,13.34 26.39,13.21 25.7,12.51 25.56,12.51 C6.2 | IC2.C2 v19.61,16.11 19.61,14.94 C34.2 | 26.46,18.33 26.46,17.91 U1.P$C1 26.32,17.78 v26.05,17.5 | 26.46,18.33 U1.P$B1 | 26.46,18.33 26.32,18.4 25.91,18.4 25.7,18.61 25.42,18.61 C14.2 | U1.P$AD14 29.99,12.31 29.99,12.03 30.55,11.47 C7.2 30.69,11.41 v31.17,11.41 | 41.32,3.55 43.43,5.66 Q1.2 43.36,5.8 43.36,8.22 43.01,8.57 41.77,8.57 39.1,11.23 | 41.32,3.55 39.14,1.36 38.65,1.36 R5.2 | v40.24,4.62 39.76,4.62 R_PWR_EPD.2 | v41.21,3.65 41.32,3.55 | 39.1,11.23 37.61,12.72 34.21,12.72 C8.2 | 39.1,11.23 42.8,14.94 42.8,27.13 41.63,28.3 40.87,28.3 40.66,28.09 39.97,28.09 J2.1 | v26.53,13.34 26.39,13.34
  Top 0.3: v23.14,18.47 23.14,18.61
  Bottom 0.3: v12.96,31.21 v13.79,30.38 13.86,30.24 13.86,20.48 18.57,15.77 19.12,15.77 19.26,15.7 | v15.18,6.07 16.35,4.9 v18.91,4.9 18.98,5.04 18.98,6.63 19.68,7.32 19.68,8.91 19.26,9.33 19.26,15.7 | v31.73,20.34 31.73,20.13 | 31.73,20.13 v31.73,18.4 | v41.21,3.65 v40.24,4.62 40.17,4.76 40.17,6.63 34.63,12.17 | 34.63,12.17 33.73,12.17 32.97,11.41 v31.17,11.41 31.03,11.47 28.75,11.47 26.88,13.34 | 26.05,16.53 26.05,15.28 26.88,14.45 26.88,13.34 | 26.05,16.53 v26.05,17.5 | 26.05,16.53 23.14,16.53 | 23.14,16.53 22.52,16.53 22.1,16.11 v19.61,16.11 19.54,15.98 19.26,15.7 | 26.88,13.34 v26.53,13.34 | 31.73,20.13 37.47,20.13 37.82,19.79 37.82,15.42 34.7,12.31 34.63,12.17 | 23.14,16.53 v23.14,18.47
ALERT  (via drill 0.3)
  Top 0.15: v32.49,15.56 32.49,15.91 32.9,16.32 U1.P$J24 | v23.41,6.77 20.09,6.77 19.33,6.01 18.43,6.01 U3.5
  Power 0.15: v32.49,15.56 32.49,13.9 30.89,12.31 29.02,12.31 23.48,6.77 v23.41,6.77
D+  (via drill 0.3)
  Top 0.15: v27.5,11.89 27.92,12.31 U1.P$AD6 | v28.82,21.24 28.82,22.69 D1.4
  Power 0.15: v27.5,11.89 27.5,13.28 27.29,13.48 27.29,19.72 v28.82,21.24
D-  (1 unrouted)
DEC3  (via drill 0.3)
  Top 0.15: v32.9,17.85 32.7,17.64 32.49,17.64 U1.P$D23 | v36.23,16.95 34.7,16.95 34.43,16.67 33.8,16.67 C11.2
  Bottom 0.15: v32.9,17.85 34.29,17.85 35.19,16.95 v36.23,16.95
DEC4_6  (via drill 0.3)
  Top 0.15: U1.P$E24 32.97,17.36 33.25,17.36 33.59,17.71 33.73,17.71 C10.2 33.87,17.78 34.43,17.78 v34.7,18.05 | 28.82,20.48 28.82,19.99 27.71,18.89 27.71,18.4 U1.P$B5 | 28.82,20.48 28.54,20.75 C15.2 28.33,20.82 28.19,20.96 28.19,23.25 26.05,25.39 L3.2 | 28.82,20.48 28.89,20.48 29.16,20.75 29.79,20.75 C16.2 29.86,20.82 30.06,21.03 32.21,21.03 34.15,19.09 v35.4,19.09
  Bottom 0.15: v34.7,18.05 34.7,18.4 v35.4,19.09
DN
  Top 0.15: J3.B6 25.84,27.61 J3.A7 25.84,27.54 25.84,27.06 26.12,26.78 26.67,26.78 27.36,26.09 27.36,25.39 28.33,24.43 30.06,24.43 30.62,24.98 30.62,25.19 D1.1
DP
  Top 0.15: J3.A6 26.39,27.61 26.81,27.61 J3.B7 26.81,27.54 26.81,27.13 27.16,26.78 27.22,26.78 D1.3
EPD_3V3  (via drill 0.3)
  Top 0.15: 12.13,16.95 11.64,16.95 10.95,16.25 10.67,16.25 J1.15 10.67,16.18 10.67,15.77 J1.16 | 12.13,16.95 12.61,16.95 EDP_C5.1 | v13.86,15.28 14.62,14.52 15.73,14.52 C1-EP-DR.1 15.8,14.45 15.8,14.11 16.35,13.55 L5.2 16.42,13.41 21.2,13.41 25.22,9.4 35.74,9.4 36.37,8.77 36.37,7.32 39.55,4.13 41.14,4.13 42.46,5.45 42.46,7.74 Q1.3 | v12.13,16.88 12.13,16.95
  Bottom 0.15: v13.86,15.28 13.72,15.28 v12.13,16.88
EPD_BUSY
  Top 0.15: U1.P$AD12 29.44,12.31 29.44,10.78 29.09,10.44 24.59,10.44 20.85,14.18 17.39,14.18 12.34,19.23 10.67,19.23 J1.9
EPD_RST  (1 unrouted)
GDR  (via drill 0.3)
  Top 0.15: v20.44,8.43 19.95,8.43 R2_EP_DR.2 | v21.48,9.68 21.48,10.85 20.3,12.03 20.09,12.03 Q3.1 | v9.91,22.35 10.26,22.69 10.6,22.69 J1.2
  Bottom 0.15: v21.48,9.68 20.44,8.64 v20.44,8.43 20.44,5.8 19.05,4.41 16.21,4.41 14.55,6.07 14.55,15.21 9.91,19.85 v9.91,22.35
GND  (via drill 0.3, 0.35)
  Top 0.3: C13.1 31.1,20.13 31.45,19.79 32.28,19.79 C12.1 32.42,19.65 v32.76,19.3 | v37.27,19.58 38.17,19.58 X1.4 | v29.86,19.72 29.86,20.2 C16.1 | 27.92,17.43 28.19,17.71 28.19,18.33 U1.P$B7 | U1.P$F23 32.42,17.15 31.73,17.15 31.52,17.36 U1.P$74 | U1.P$74 27.92,14.94 27.92,13.83 U1.P$87 28.05,13.83 29.09,13.83 U1.P$88 29.23,13.83 30.27,13.83 U1.P$89 30.41,13.83 31.45,13.83 U1.P$90 31.52,13.97 31.52,14.94 U1.P$86 | U1.P$83 27.92,15.01 U1.P$74 | U1.P$79 27.92,16.25 28.4,16.74 U1.P$74 | U1.P$84 29.09,15.28 U1.P$74 | U1.P$80 29.09,16.25 U1.P$74 | U1.P$85 30.27,15.01 29.79,15.49 U1.P$74 | U1.P$81 30.34,16.25 U1.P$74 | U1.P$82 31.45,16.25 30.96,16.74 U1.P$74 | 27.92,17.43 U1.P$75 | 27.92,17.43 U1.P$74 | U1.P$76 29.09,17.36 28.61,16.88 U1.P$74 | U1.P$77 30.34,17.36 30.82,16.88 U1.P$74 | U1.P$78 31.52,17.43 U1.P$74 | 34.22,15.01 34.43,15.21 34.43,15.7 34.01,16.11 33.8,16.11 C11.1 | 34.22,15.01 33.94,15.01 C3.1 | 34.46,13.73 34.49,13.76 34.49,14.38 34.29,14.59 34.29,14.87 34.22,15.01 | 34.46,13.73 34.29,13.55 34.01,13.55 C9.1 | 34.46,13.73 34.56,13.62 38.51,13.62 C4.1 38.65,13.55 39.34,13.55 C22.1 39.55,13.55 40.73,13.55 41.77,14.59 41.77,16.81 41.56,17.02 41.49,17.15 | 36.5,17.5 38.58,17.5 38.93,17.15 41.49,17.15 | 36.5,17.5 34.7,17.5 34.49,17.29 33.8,17.29 C10.1 | 41.49,17.15 41.7,17.36 41.7,17.64 C1.1 41.7,17.85 41.7,18.05 41.56,18.19 41.56,18.47 | 41.56,18.47 41.56,20.48 C2.1 41.49,20.62 41.49,20.82 39.07,23.25 37.27,23.25 35.26,25.26 35.26,27.47 | 41.56,18.47 39.69,18.47 X1.2 | 34.56,33.5 34.84,33.22 35.81,33.22 35.95,33.36 38.58,33.36 C42.2 | 34.56,33.5 34.56,33.77 C43.1 | 34.56,33.5 34.43,33.43 31.52,33.43 30.48,32.39 J3.SH1
  Top 0.3: J2.3 38.65,28.03 37.47,28.03 J2.5 37.27,28.03 37.06,28.03 36.5,27.47 35.26,27.47 | 31.1,28.86 31.1,29.83 R2_USB.2 31.17,29.96 31.17,30.45 R2_USB.1 31.1,30.59 30.55,31.14 30.55,32.25 J3.SH1 | 31.1,28.86 30.48,28.23 J3.SH3 30.27,28.16 29.79,27.68 29.72,27.68 | 29.72,27.68 29.3,27.68 J3.A1_B12 | 29.72,27.68 29.72,25.26 D1.2 | 35.26,27.47 32.56,27.47 31.24,28.79 31.1,28.86 | 36.5,17.5 v36.5,17.85 | R_TYPE_SEL.1 15.66,1.09 16.28,1.09 16.98,1.78 16.98,1.99 SJ1.1 | 14.97,2.2 16.7,2.2 16.84,2.06 SJ1.1 | 14.97,2.2 C29.1 | SW_DN.1 13.51,4.76 14.14,4.76 14.9,4 14.9,2.33 14.97,2.2 | 36.12,4.72 36.09,4.76 35.53,4.76 SW_UP.1 | 36.12,4.72 36.85,4 36.85,1.92 C30.1 | C18.2 24.39,12.58 24.59,12.58 25.22,11.96 C6.1 25.56,11.82 25.56,11.2 25.91,10.85 26.19,10.85 C20.1 26.32,10.85 26.88,10.85 | 26.88,10.85 27.85,10.85 27.99,10.99 28.26,10.99 C21.1 | v30.2,10.44 30.55,10.78 30.55,10.92 C7.1 | v26.88,10.99 26.88,10.85 | v33.94,11.61 33.94,12.21 C8.1 | v36.23,4.83 36.12,4.72 | v18.98,3.93 18.15,3.1 17.88,3.1 17.11,2.33 17.11,2.13 SJ1.1 | C31.1 25.84,1.99 25.84,4 25.08,4.76 24.52,4.76 SW_ENT.1 24.45,4.9 24.45,6.49 23.35,7.6 D4.1 23.21,7.74 22.24,7.74 | 22.24,7.74 21.37,8.6 | 21.37,8.6 20.99,8.98 19.95,8.98 R2_EP_DR.1 | EPD_C6.2 13.1,16.11 13.1,16.95 EDP_C5.2 | C1-EP-DR.2 16.21,14.52 16.21,14.8 14.97,16.05 13.24,16.05 EPD_C6.2 | EPD_C6.2 12.96,16.05 12.47,16.05 11.71,15.28 10.67,15.28 J1.17 10.54,15.21 10.19,15.21 | U3.4 16.42,5.94 16.84,5.94 17.39,6.49 U3.9 | U3.9 17.53,6.49 18.36,6.49 U3.6 18.5,6.49 19.26,6.49 21.37,8.6 | 13.1,9.61 13.1,8.64 13.93,7.8 15.31,7.8 15.52,7.6 C27.1 15.66,7.46 16.35,7.46 U3.1 16.56,7.46 16.84,7.46 17.32,6.97 17.32,6.84 U3.9
  Top 0.3: 13.1,9.61 13.1,10.09 EPD_C12.2 | 9.98,10.92 10.88,10.92 12.2,9.61 13.1,9.61 | 9.98,10.92 8.04,10.92 J1.MP2 | 10.19,15.21 9.98,15.01 9.98,10.92 | TP_GND.TP 3.89,31.84 3.26,31.21 3.26,29.34 TP_BAT_GND.TP 3.33,29.2 3.33,28.72 7.9,24.15 J1.MP1 8.04,24.01 11.92,24.01 12.89,23.04 | 12.89,23.04 12.89,22.83 EPD_C2.2 12.96,21.93 EPD_C1.2 12.89,21.79 12.89,21.59 11.09,19.79 10.67,19.79 J1.8 10.54,19.72 10.19,19.72 9.98,19.51 9.98,15.49 10.12,15.35 10.19,15.21 | 14.9,30.24 14.9,30.59 C25.2 | 14.9,30.24 14.9,29.83 C33.2 | 16.42,30.38 16.42,30.73 C38.1 16.42,30.87 16.42,31.56 C39.2 | 16.42,30.38 16.42,30.24 C38.2 16.28,30.24 14.9,30.24 | 18.57,31.84 18.57,31.49 18.84,31.21 18.84,30.52 | 18.84,30.31 18.84,30.52 | 18.57,31.84 IC1.D2 | 18.84,30.31 C37.1 | IC1.A2 18.57,33.08 18.71,33.08 18.91,32.87 18.91,32.11 18.71,31.9 18.57,31.84 | 18.84,30.31 17.81,30.31 R9.1 17.67,30.38 16.42,30.38 | 18.84,30.52 20.65,30.52 | 20.65,30.52 21.06,30.52 | 21.06,30.52 R1_USB.1 | 9.6,34.16 9.43,34.33 9.15,34.33 C24.1 | 9.6,34.16 9.77,33.98 9.77,33.84 C23.1 | 11.78,32.73 11.78,32.46 | 11.78,32.46 IC9.C1 | 11.78,32.73 IC9.B1 | 12.2,32.39 11.92,32.39 11.78,32.46 | 12.2,32.39 IC9.C2 | 12.2,32.39 12.54,32.39 IC9.C3 | v11.3,32.87 11.37,32.8 11.64,32.8 11.78,32.73 | v9.77,34.33 9.6,34.16 | 21.06,30.52 21.13,30.66 21.13,31.7 21.75,32.32 J3.SH2 21.89,32.32 30.27,32.32 J3.SH1 | 18.64,17.09 18.36,17.09 18.01,16.74 18.01,16.05 19.12,14.94 C34.1 | 18.64,17.09 19.05,17.09 IC2.B1 | 23.35,17.57 23.35,17.36 C17.2 | 23.35,17.57 23.76,17.98 C5.1 23.9,18.05 23.97,18.12 24.59,18.12 | 24.59,18.12 25.35,18.12 C14.1 | 24.8,20.69 27.22,20.69 27.64,20.27 28.33,20.27 C15.1
  Top 0.3: 24.8,20.69 24.59,20.48 24.59,18.12 | 18.64,17.09 18.64,18.61 19.26,19.23 20.71,19.23 21.89,18.05 22.79,18.05 23.21,17.64 23.35,17.57 | 17.22,23.56 17.11,23.45 C19.2 | 17.22,23.56 18.98,25.32 R3.1 19.33,25.32 20.37,25.32 22.24,27.2 22.24,27.54 22.31,27.68 | 20.4,16.91 20.92,16.39 20.92,14.94 C32.2 | 20.4,16.91 20.23,17.09 20.16,17.09 IC2.B3 | IC3.8 19.19,21.52 19.61,21.52 IC3.9 19.61,21.38 v19.61,20.96 | 22.31,27.68 22.86,27.68 J3.A12_B1 22.93,27.47 22.93,27.13 23.35,26.71 24.11,26.71 | 22.31,27.68 21.82,28.16 J3.SH4 21.68,28.3 20.65,29.34 20.65,30.52 | 24.11,26.71 24.32,26.92 24.32,27.61 J3.B5 | v20.65,17.15 20.4,16.91 | 24.8,20.69 24.73,20.82 24.73,20.96 24.18,21.52 24.18,26.57 24.11,26.71 | 17.22,23.56 16.84,23.94 16.28,23.94 15.45,23.11 13.03,23.11 12.89,23.04 | v22.31,7.53 22.31,7.6 22.24,7.74
  Bottom 0.3: 36.5,19.58 35.67,19.58 35.6,19.65 33.73,19.65 33.08,18.99 | 36.5,19.58 v37.27,19.58 | 33.08,18.99 31.52,17.43 U1.P$78 | 33.08,18.99 v32.76,19.3 | v29.86,19.72 29.86,17.85 30.27,17.43 U1.P$77 | v36.5,17.85 36.5,19.58 | v33.94,11.61 33.94,7.8 33.59,7.46 | 33.59,7.46 33.53,7.39 33.11,7.39 30.2,10.3 v30.2,10.44 29.23,10.44 29.16,10.37 27.5,10.37 v26.88,10.99 26.74,10.92 22.83,7.01 | 33.59,7.46 v36.23,4.83 | v18.98,3.93 19.75,3.93 22.83,7.01 | J3.SH2 21.75,32.39 20.16,33.98 12.82,33.98 11.71,32.87 v11.3,32.87 11.16,32.94 v9.77,34.33 | J3.SH4 21.75,28.16 21.75,23.45 19.61,21.31 v19.61,20.96 19.68,20.82 20.65,19.85 v20.65,17.15 | v22.31,7.53 22.83,7.01
  other vias: 30,33.6 28.2,33.6 26.4,33.6 24.6,33.6 22.8,33.6 4.8,33.6 42.6,31.8 40.8,31.8 39,31.8 33.6,31.8 31.8,31.8 44.4,30 31.8,30 30,30 28.2,30 26.4,30 4.8,30 1.2,30 44.4,28.2 42.6,28.2 33.6,28.2 19.2,28.2 4.8,28.2 1.2,28.2 44.4,26.4 33.6,26.4 31.8,26.4 22.8,26.4 19.2,26.4 17.4,26.4 4.8,26.4 3,26.4 1.2,26.4 44.4,24.6 33.6,24.6 31.8,24.6 22.8,24.6 17.4,24.6 15.6,24.6 10.2,24.6 8.4,24.6 44.4,22.8 40.8,22.8 35.4,22.8 33.6,22.8 31.8,22.8 22.8,22.8 8.4,22.8 44.4,21 39,21 37.2,21 33.6,21 21,21 17.4,21 15.6,21 8.4,21 40.8,19.2 17.4,19.2 13.8,19.2 8.4,19.2 44.4,17.4 8.4,17.4 39,15.6 8.4,15.6 44.4,13.8 42.6,13.8 22.8,13.8 8.4,13.8 44.4,12 42.6,12 40.8,12 37.2,12 21,12 15.6,12 8.4,12 44.4,10.2 42.6,10.2 39,10.2 35.4,10.2 15.6,10.2 10.2,10.2 8.4,10.2 44.4,8.4 40.8,8.4 12,8.4 10.2,8.4 8.4,8.4 6.6,8.4 4.8,8.4 3,8.4 1.2,8.4 44.4,6.6 40.8,6.6 39,6.6 35.4,6.6 10.2,6.6 8.4,6.6 28.2,1.2 8.4,1.2 6.6,1.2 4.8,1.2 30,1.2 40.8,1.2 3,3 4.8,3 6.6,3 8.4,3 12,3 22.8,3 26.4,3 28.2,3 30,3 33.6,3 39,3 42.6,3 1.2,4.8 3,4.8 4.8,4.8 6.6,4.8 8.4,4.8 26.4,4.8 28.2,4.8 30,4.8 31.8,4.8 44.4,4.8 1.2,6.6 3,6.6 4.8,6.6 6.6,6.6
  pour Top: -2.4,38.4 45,38.4 53.8,29.6 50.6,26.4 50.6,-5 -5.3,-5 -5.3,35.4 -2.4,38.3
  pour Bottom: -2.2,38.1 -1.3,37.2 50.6,37.2 50.6,-5.7 48.8,-7.5 3.7,-7.5 -1.8,-2 -1.8,37.7
HAPTIC_EN  (via drill 0.3)
  Top 0.15: v25.84,14.73 26.19,14.38 26.39,14.38 U1.P$U1 | v23.83,15.98 23.62,15.98 21.96,17.64 21.75,17.64 20.58,18.82 19.4,18.82 19.05,18.47 19.05,17.64 IC2.A1
  Bottom 0.15: v25.84,14.73 25.08,14.73 v23.83,15.98
IMU_INT1  (via drill 0.3)
  Top 0.15: v22.65,15.91 23.35,15.21 26.19,15.21 26.25,15.28 26.39,15.28 U1.P$N1 | v19.61,22.07 19.26,22.07 18.84,22.49 18.64,22.49 IC3.5
  Power 0.15: v22.65,15.91 22.65,17.85 20.23,20.27 20.23,21.45 v19.61,22.07
IMU_INT2  (1 unrouted)
LX1
  Top 0.15: IC9.B2 12.27,32.8 12.54,32.8 IC9.B3 12.61,32.8 13.03,32.8 13.51,33.29 13.51,33.57 13.17,33.91 11.71,33.91 9.36,31.56 9.36,30.24 9.15,30.03 7.83,30.03 6.52,31.35 L7.1
LX2
  Top 0.15: L7.2 8.6,31.42 11.37,34.19 13.3,34.19 13.79,33.7 13.79,33.01 12.75,31.97 12.61,31.97 IC9.D3 IC9.D2
N$1
  Top 0.15: R1.2 15.11,32.32 15.11,31.21 14.97,31.07 13.86,31.07 13.11,30.33 12,30.33 11.44,30.89 11.44,31.7 11.71,31.97 11.78,31.97 IC9.D1
N$2  (via drill 0.3)
  Top 0.15: v18.08,31.21 18.08,31.84 IC1.D1 | v17.25,29.83 17.67,29.83 17.74,29.76 R9.2
  Bottom 0.15: v18.08,31.21 18.08,30.66 v17.25,29.83
N$3  (via drill 0.3)
  Top 0.15: v20.16,25.88 19.26,25.88 R3.2 | v20.16,24.43 20.16,23.11 IC3.1
  Bottom 0.15: v20.16,24.43 v20.16,25.88
N$4  (via drill 0.35)  (1 unrouted)
  Top 0.15: IC9.E1 11.8,31 11.9,30.9 v12.1,30.9
  Bottom 0.15: v12.1,30.9 12.4,31.2 12.4,31.8 14.3,31.8 14.7,31.4
N$5
  Top 0.15: U1.P$AC5 27.64,12.79 26.81,12.79 26.12,12.1 26.12,11.47 26.19,11.41 C20.2
N$6
  Top 0.15: U1.P$N24 32.97,15.28 33.46,14.8 33.46,14.66 34.01,14.11 C9.2
N$7  (via drill 0.3)
  Top 0.15: 33.11,16.67 32.49,16.67 U1.P$H23 | 33.11,16.67 33.32,16.46 33.32,15.98 33.87,15.42 C3.2 | v33.18,16.81 33.11,16.74 33.11,16.67 | v36.37,16.05 35.81,16.05 35.4,15.63 L1.1
  Bottom 0.15: v33.18,16.81 34.91,16.81 35.67,16.05 v36.37,16.05
N$8
  Top 0.15: L1.2 37.47,15.56 38.65,14.38 38.65,14.18 C4.2 38.65,14.11 39.34,14.11 C22.2 39.41,14.11 40.87,15.56 ANT1.1
N$9
  Top 0.15: U1.P$B3 27.16,18.4 27.16,18.61 26.05,19.72 L2.1
N$10
  Top 0.15: L2.2 26.05,21.86 26.05,23.32 L3.1
N$11
  Top 0.15: U1.P$A18 30.89,18.89 30.89,19.65 30.62,19.92 30.62,20.34 30.89,20.62 31.03,20.62 C13.2
N$12
  Top 0.15: U1.P$B24 32.97,18.4 34.43,18.4 34.56,18.54 34.91,18.54 35.12,18.33 38.1,18.33 38.17,18.4 X1.1 38.23,18.4 38.93,17.71 41.21,17.71 C1.2
N$13
  Top 0.15: U1.P$A23 32.49,18.82 35.05,18.82 35.26,18.61 35.67,18.61 37.34,20.27 38.93,20.27 X1.3 39.69,19.58 40.59,20.48 41,20.48 C2.2
N$15  (via drill 0.3)
  Top 0.15: 22.34,11.16 22.17,11.34 Q3.3 | 22.34,11.16 24.39,9.12 34.08,9.12 34.29,8.91 34.29,8.71 C2-EP-DR.2 34.43,8.71 v35.81,8.71 | v38.1,7.94 39,7.94 D5.2 | v19.81,9.54 19.26,8.98 16.42,8.98 L5.1 | 22.34,11.16 v21.96,10.78
  Bottom 0.15: v38.1,7.94 36.57,7.94 v35.81,8.71 | v19.81,9.54 20.71,9.54 v21.96,10.78
N$16
  Top 0.15: C2-EP-DR.1 33.8,8.64 29.72,8.64 28.89,7.8 D2.1 28.82,7.74 26.81,7.74 D4.2
N$17
  Top 0.15: R_TYPE_SEL.2 15.66,0.53 17.25,0.53 18.5,1.78 18.5,1.99 SJ1.2 18.57,2.06 18.57,2.89 19.54,3.86 R1_EP_DR.1
N$19
  Top 0.15: EPD_C2.1 12.4,22.69 11.51,21.79 10.67,21.79 J1.4
N$20
  Top 0.15: EPD_C1.1 12.4,21.86 11.99,21.86 11.44,21.31 10.67,21.31 J1.5
N$21
  Top 0.15: EPD_C6.1 13.1,15.49 12.47,15.49 11.78,14.8 10.67,14.8 J1.18
N$22
  Top 0.15: EPD_C7.1 12.89,14.8 12.2,14.8 11.71,14.31 10.67,14.31 J1.19
N$23
  Top 0.15: EPD_C8.1 12.61,13.76 10.67,13.76 J1.20
N$24
  Top 0.15: EPD_C9.1 12.68,12.86 11.37,12.86 11.02,13.21 10.67,13.21 J1.21
N$25
  Top 0.15: EPD_C10.1 12.82,11.96 11.71,11.96 10.95,12.72 10.67,12.72 J1.22
N$26
  Top 0.15: EPD_C11.1 12.68,11.06 12.13,11.06 10.95,12.24 10.67,12.24 J1.23
N$27
  Top 0.15: EPD_C12.1 12.54,10.16 12.2,10.16 10.67,11.68 J1.24
N$28
  Top 0.15: R1_USB.2 21.13,29.9 25.63,29.9 27.29,28.23 27.29,27.68 J3.A5
OUT+  (via drill 0.3)
  Top 0.15: v21.55,16.81 21.55,16.88 20.78,17.64 20.16,17.64 IC2.A3 | v21.55,19.79 22.65,20.89 TP_OP.TP
  Bottom 0.15: v21.55,19.79 v21.55,16.81
OUT-
  Top 0.15: IC2.C3 20.09,14.66 19.88,14.45 18.91,14.45 16.14,17.22 16.14,18.47 TP_ON.TP
P0.00
  Top 0.15: U1.P$D2 26.95,17.57 26.74,17.57 25.42,16.25 25.15,16.25 X2.1 25.08,16.32 24.11,17.29 23.9,17.29 C17.1
P0.01  (1 unrouted)
  Top 0.15: C18.1 23.9,12.65 23.9,12.79 24.8,13.69 25.08,13.69 X2.2
P0.13  (via drill 0.3)
  Top 0.15: 37.34,1.36 38.03,1.36 38.58,1.92 R5.1 | 37.34,1.36 36.92,1.36 C30.2 | v28.95,10.92 28.95,11.54 28.47,12.03 28.47,12.31 U1.P$AD8 | 33.32,5.73 v33.32,7.94 | 33.32,5.73 32.76,5.17 32.76,4.83 SW_UP.2 | 37.34,1.36 37.34,4.34 35.95,5.73 33.32,5.73
  Bottom 0.15: v28.95,10.92 30.34,10.92 v33.32,7.94
P0.14  (via drill 0.3)  (1 unrouted)
  Top 0.15: R8.1 20.65,5.31 21.2,5.31 21.68,4.83 SW_ENT.2 21.68,4.76 v23.83,2.61 | v26.46,1.43 C31.2
  Bottom 0.15: v26.46,1.43 26.32,1.43 25.15,2.61 v23.83,2.61
P1.01
  Top 0.15: U1.P$Y23 32.49,13.55 32.49,12.79 33.46,11.82 33.46,11.47 35.26,9.68 35.88,9.68 37.61,7.94 37.61,7.32 39.69,5.24 R_PWR_EPD.1 39.76,5.24 40.17,5.66 41.49,5.66 Q1.1
P1.02  (via drill 0.3)
  Top 0.15: 13.86,6.56 12.13,6.56 10.74,5.17 10.74,4.83 SW_DN.2 | 13.86,6.56 14.27,6.56 R7.1 | v33.39,14.11 33.18,13.9 32.97,13.9 U1.P$W24 | v16.07,1.64 14.97,1.64 C29.2 | 13.86,6.56 13.86,5.66 15.73,3.79 v15.73,2.75
  Bottom 0.15: v15.73,2.75 15.73,1.99 v16.07,1.64
  Power 0.15: v33.39,14.11 33.11,14.11 31.03,12.03 30.96,12.03 21.13,2.2 16.63,2.2 v16.07,1.64
PMIC_INT  (1 unrouted)
PREVGH  (via drill 0.3)
  Top 0.15: v13.93,14.38 13.86,14.38 13.51,14.04 13.51,13.48 13.3,13.28 13.3,12.86 EPD_C9.2 | v33.94,6.28 35.53,7.87 D5.1
  Bottom 0.15: v13.93,14.38 13.93,6.28 16.98,3.23 19.68,3.23 22.72,6.28 v33.94,6.28
PREVGL
  Top 0.15: EPD_C11.2 13.3,11.06 19.26,11.06 19.47,11.27 20.65,11.27 20.99,10.92 20.99,9.54 22.17,8.36 24.8,8.36 26.12,7.04 31.66,7.04 32.35,7.74 D2.2
RESE  (via drill 0.3)
  Top 0.15: v18.22,5.45 18.29,5.38 18.29,4.9 18.78,4.41 19.68,4.41 20.02,4.07 20.02,3.65 19.75,3.37 19.61,3.37 R1_EP_DR.2 | v17.67,10.57 17.81,10.57 17.95,10.71 20.02,10.71 Q3.2 | v11.78,22.69 11.37,22.28 10.67,22.28 J1.3
  Bottom 0.15: v18.22,5.45 18.22,7.53 17.67,8.08 v17.67,10.57 17.67,13.21 11.78,19.09 v11.78,22.69
RESET  (via drill 0.3)  (1 unrouted)
  Top 0.15: v36.16,25.12 37.4,26.36 37.4,26.71 J2.6 | v36.16,23.39 36.16,21.79 35.33,20.96 TP_RESET.TP
  Bottom 0.15: v36.16,23.39 v36.16,25.12
SCL  (via drill 0.3)  (1 unrouted)
  Top 0.15: v17.18,32.8 17.25,32.73 18.08,32.73 IC1.B1 | v16.14,32.8 15.87,32.8 15.38,33.29 14.76,33.29 R1.1 | v18.57,16.53 18.64,16.6 19.05,16.6 IC2.C1 | v19.19,24.77 19.33,24.91 20.3,24.91 20.65,24.56 20.65,22.9 20.44,22.69 20.37,22.69 20.23,22.55 IC3.12 | v14.41,28.86 12.4,26.85 11.85,26.85 R17.2 | v19.12,7.53 19.12,7.39 18.71,6.97 18.43,6.97 U3.7 | v15.11,28.3 14.97,28.16 14.97,26.92 TP_SCL.TP
  Bottom 0.15: v16.14,32.8 16.77,32.8 | 16.77,32.8 v17.18,32.8 | 18.57,24.77 18.57,27.75 16.77,29.55 | 18.57,24.77 v18.57,16.53 | 16.77,32.8 16.77,29.55 | 18.57,24.77 v19.19,24.77 | 15.11,28.86 16.01,28.86 16.7,29.55 16.77,29.55 | 15.11,28.86 v14.41,28.86 | 15.11,28.86 v15.11,28.3
  Power 0.15: v19.12,7.53 19.12,15.77 18.57,16.32 v18.57,16.53
SDA  (via drill 0.3)
  Top 0.15: 12.09,25.91 12.75,25.26 13.17,25.26 TP_SDA.TP | 12.09,25.91 11.3,26.71 6.52,26.71 R18.2 | 22.52,16.39 22.79,16.39 23.69,15.49 26.05,15.49 26.39,15.84 U1.P$L1 | 22.52,16.39 21.34,15.21 21.34,14.59 21.2,14.45 20.71,14.45 20.51,14.66 20.51,14.87 C32.1 | 17.6,32.32 17.05,32.32 16.63,32.73 16.63,32.94 15.94,33.64 14.41,33.64 14.27,33.5 14.27,32.46 14.69,32.04 R2.1 | 17.6,32.32 18.08,32.32 IC1.C1 | IC2.B2 19.61,17.15 19.61,17.57 IC2.A2 19.54,17.64 19.54,17.98 | v19.61,23.66 19.61,23.11 IC3.2 | 19.54,17.98 v19.54,18.33 | v18.36,8.01 18.36,7.46 U3.8 | v17.6,31.97 17.6,32.32 | 19.54,17.98 20.99,17.98 22.52,16.46 22.52,16.39 | 12.09,25.91 15.11,28.93 v18.01,28.93
  Bottom 0.15: v19.54,18.33 19.12,18.75 19.12,22.21 19.61,22.69 v19.61,23.66 19.68,23.66 19.68,28.93 | v17.6,31.97 17.95,31.97 19.68,30.24 19.68,28.93 | 19.68,28.93 v18.01,28.93
  Power 0.15: v18.36,8.01 18.36,11.27 18.08,11.54 18.08,14.59 18.15,14.66 18.15,16.11 17.95,16.32 17.95,16.74 v19.54,18.33
SWDCLK  (via drill 0.3)
  Top 0.15: v38.03,13.07 37.96,13.14 33.73,13.14 33.53,13.34 32.97,13.34 U1.P$AA24 | v43.36,18.4 43.71,18.4 44.54,19.23 TP_SWDCLK.TP | v39.2,26.23 38.72,26.71 J2.4
  Bottom 0.15: v38.03,13.07 v43.36,18.4 43.36,18.47 39.69,22.14 39.69,25.39 39.2,25.88 v39.2,26.23
SWDIO  (via drill 0.3)
  Top 0.15: v33.39,12.58 33.18,12.79 32.97,12.79 U1.P$AC24 | 38.3,31.77 v37.75,31.77 | 38.3,31.77 40.11,33.57 TP_SWDIO.TP | J2.2 39.9,26.78 39.9,27.2 39.34,27.75 39.34,29.13 39.55,29.34 39.55,30.59 38.37,31.77 38.3,31.77
  Bottom 0.15: v33.39,12.58 28.19,12.58 27.29,13.48 27.29,18.95 35.33,26.99 35.33,29.34 v37.75,31.77
SWO
  Top 0.15: U1.P$AD22 32,12.31 32,11.06 32.35,10.71 TP_SWO.TP
VBAT  (via drill 0.3)  (1 unrouted)
  Top 0.3: C27.2 15.66,6.97 16.35,6.97 U3.2 16.42,6.84 16.42,6.49 U3.3 | v12.82,23.87 13.72,23.87 18.84,28.99 18.84,29.69 C37.2 | v15.04,7.25 15.38,6.9 15.45,6.9 C27.2 | TP_VBAT.TP 17.18,4.27 15.73,5.73 15.73,6.84 C27.2
  Bottom 0.3: v12.82,23.87 12.2,23.87 11.23,22.9 11.23,19.09 15.04,15.28 v15.04,7.25
VBUS  (via drill 0.3)
  Top 0.3: 35.6,33.91 35.19,33.91 35.12,33.84 C43.2 | 35.6,33.91 38.58,33.91 C42.1 | 26.95,11.96 26.95,11.68 27.29,11.34 27.71,11.34 27.92,11.54 28.26,11.54 C21.2 | 26.95,11.96 26.95,12.31 U1.P$AD2 | v26.6,11.96 26.95,11.96 | v29.51,21.79 29.51,22.55 29.65,22.69 D1.5 | v24.18,28.58 23.76,28.16 23.76,27.68 J3.A9_B4 | v28.05,26.64 28.47,27.06 28.47,27.61 J3.A4_B9 | v35.6,33.77 35.6,33.91
  Bottom 0.3: v24.18,28.58 24.18,27.13 26.36,24.94 | v29.51,21.79 26.36,24.94 | 26.36,24.94 v28.05,26.64 28.19,26.71 30.69,26.71 35.6,31.63 v35.6,33.77
  Power 0.3: v26.6,11.96 26.6,12.38 25.84,13.14 25.84,13.83 26.88,14.87 26.88,20.2 28.61,21.93 29.37,21.93 v29.51,21.79
VREG  (via drill 0.3)  (3 unrouted)
  Top 0.3: TP_VREG.TP 7.35,33.7 7.49,33.84 9.08,33.84 C24.2 9.22,33.77 v9.7,33.29 | IC9.A2 12.27,33.22 12.54,33.22 IC9.A3 12.75,33.22 12.96,33.43 v13.03,33.43 | v15.24,32.8 15.8,32.25 15.8,31.63 C39.1
  Bottom 0.3: v15.24,32.8 14.62,33.43 v13.03,33.43 12.89,33.36 11.85,32.32 11.09,32.32 10.12,33.29 v9.7,33.29